# Altium PCB NodeMCU_Weather.PcbDoc
Units mm, origin at the board's own origin, x right, y up, seen from the top; angles counter-clockwise.
Board outline 45 x 76 mm, 2 copper layers (Top Layer, Bottom Layer), stack 1.571 mm thick; 5 components, 4 nets, 44 pads, 84 vias.
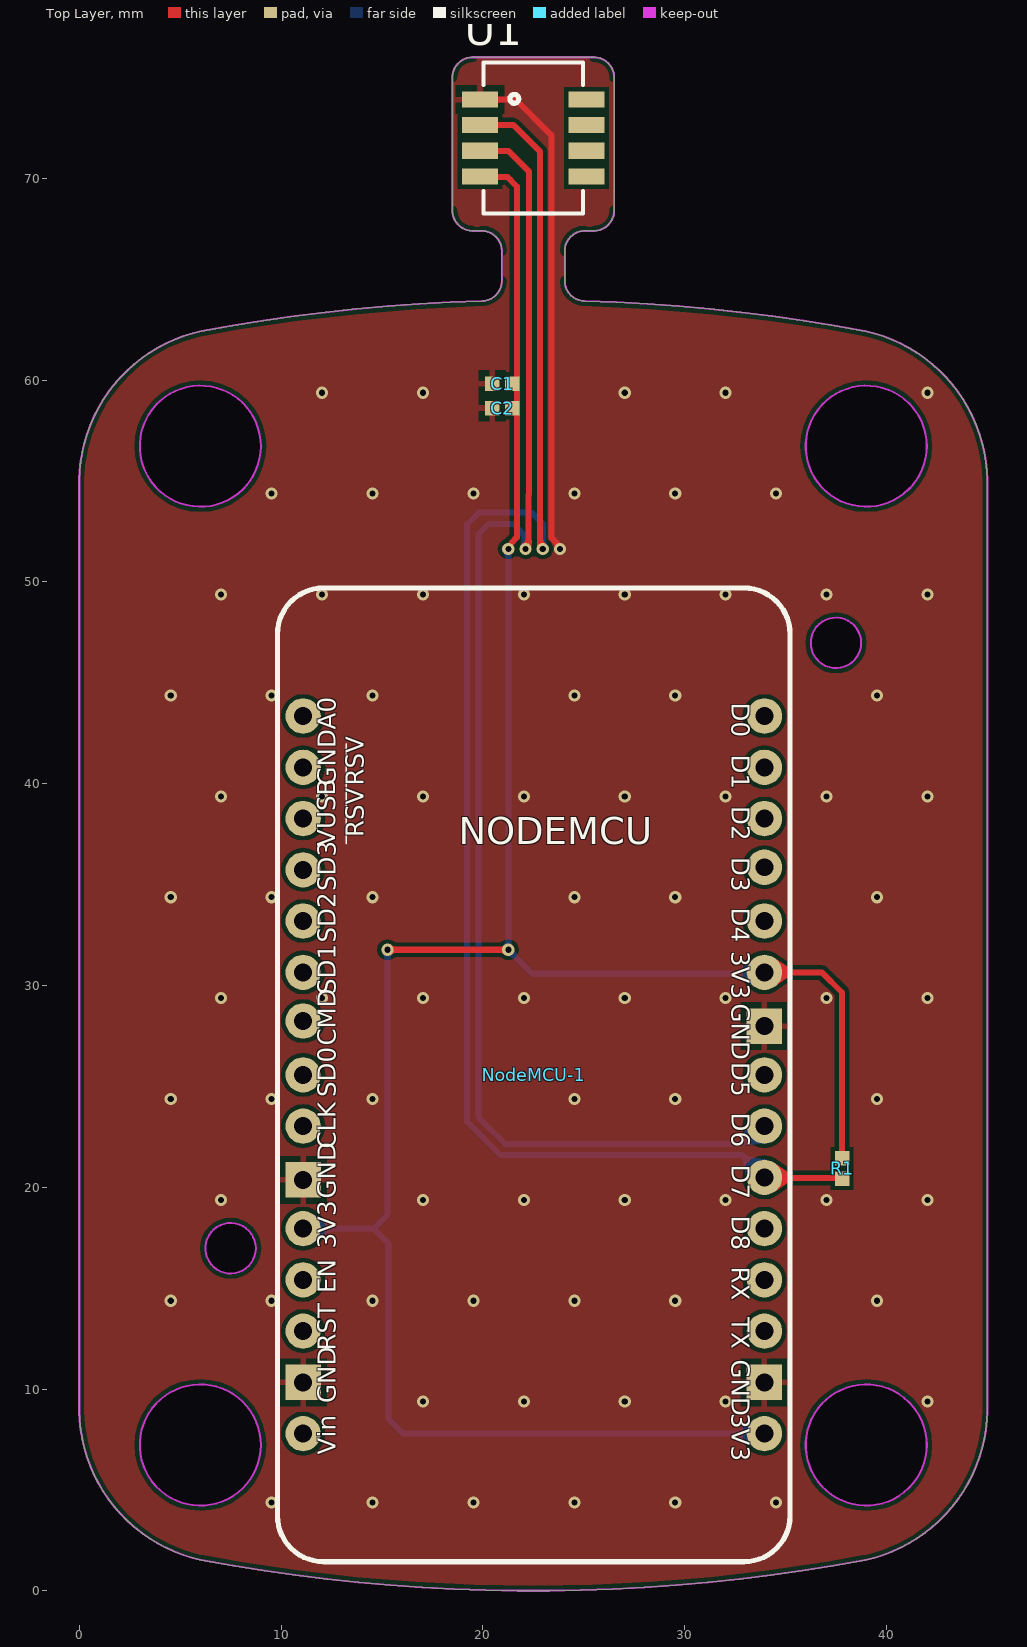
[diagram p0: Top Layer view]
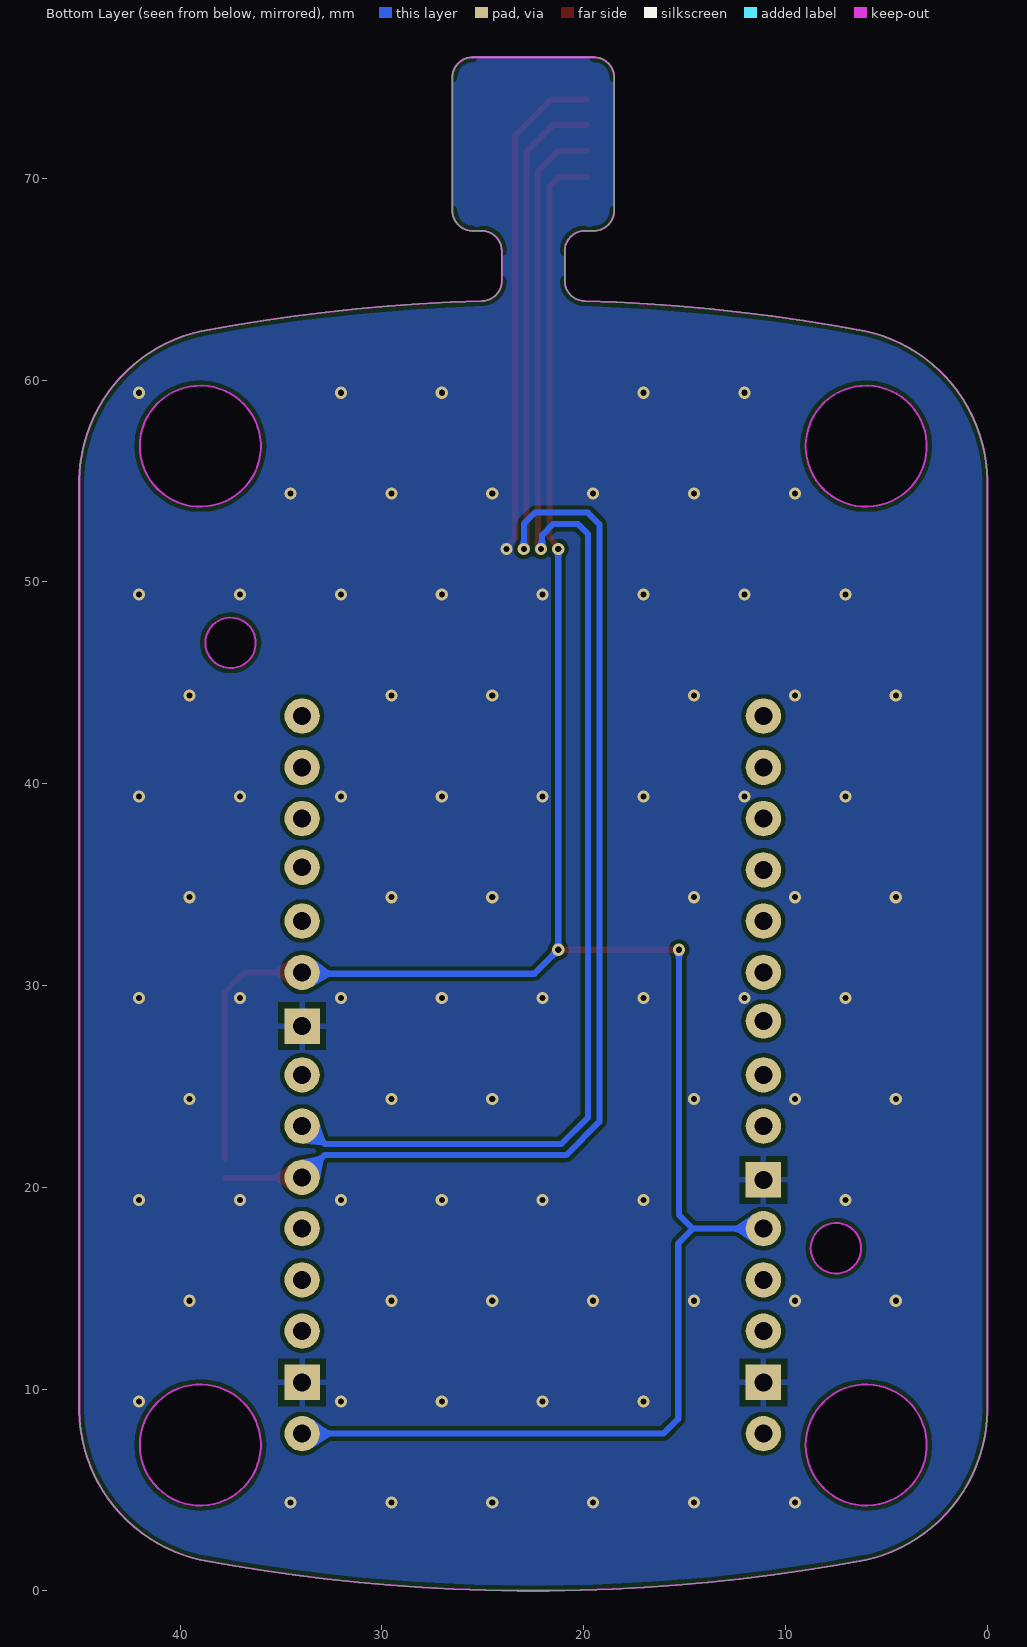
[diagram p1: Bottom Layer view, seen from below]
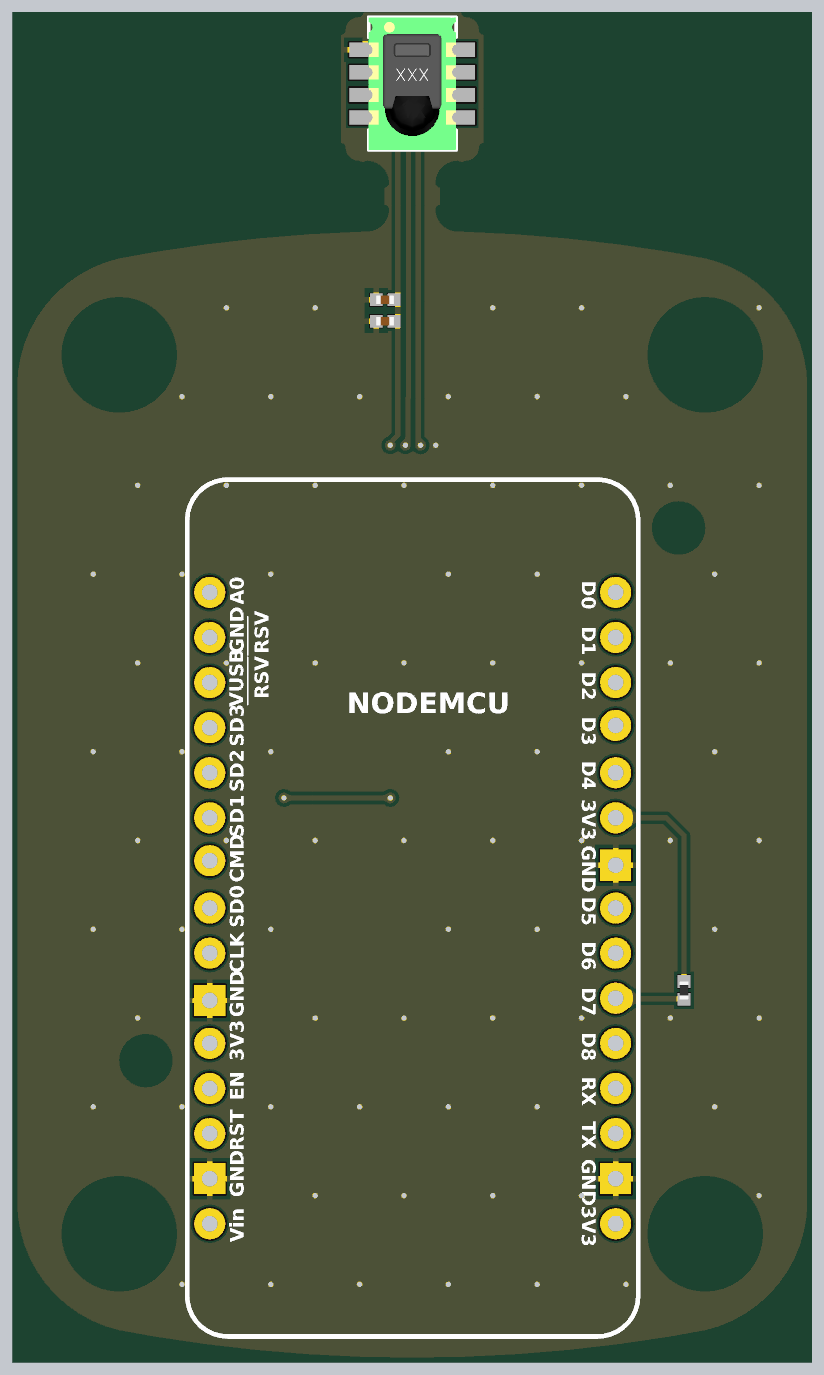
[diagram p2: 3D render of the assembled board from above, using the file's embedded part models]

## Layer stack, top to bottom
Top Solder: solder mask 0.0102, Solder Resist, Dk 3.5
Top Layer: signal copper 0.0356
Dielectric 1: dielectric 1.5, FR-4, Dk 4.8
Bottom Layer: signal copper 0.0356
Bottom Solder: solder mask 0.0102, Solder Resist, Dk 3.5

## Board outline
6.057,1.522 cw(c7.683,9.031) 0,8.919 0,55.033 cw(c7.683,54.921) 6.057,62.431 cw(c22.563,-25.98) 19.939,63.92 ccw(c19.939,64.92) 20.939,64.92 20.939,66.4 ccw(c19.939,66.4) 19.939,67.4 19.49,67.4 cw(c19.49,68.4) 18.49,68.4 18.49,75 cw(c19.49,75) 19.49,76 25.51,76 cw(c25.51,75) 26.51,75 26.51,68.4 cw(c25.51,68.4) 25.51,67.4 25.061,67.4 ccw(c25.061,66.4) 24.061,66.4 24.061,64.92 ccw(c25.061,64.92) 25.061,63.92 cw(c22.437,-25.98) 38.943,62.431 cw(c37.317,54.921) 45,55.033 45,8.919 cw(c37.317,9.031) 38.943,1.522 cw(c22.5,89.609)
cut-out: 36,7.226 ccw(c39,7.226) 39,4.226 ccw(c39,7.226) 42,7.226 ccw(c39,7.226) 39,10.226 ccw(c39,7.226)
cut-out: 6,4.226 cw(c6,7.226) 3,7.226 cw(c6,7.226) 6,10.226 cw(c6,7.226) 9,7.226 cw(c6,7.226)
cut-out: 7.5,15.726 cw(c7.5,16.976) 6.25,16.976 cw(c7.5,16.976) 7.5,18.226 cw(c7.5,16.976) 8.75,16.976 cw(c7.5,16.976)
cut-out: 6,53.726 cw(c6,56.726) 3,56.726 cw(c6,56.726) 6,59.726 cw(c6,56.726) 9,56.726 cw(c6,56.726)
cut-out: 39,53.726 cw(c39,56.726) 36,56.726 cw(c39,56.726) 39,59.726 cw(c39,56.726) 42,56.726 cw(c39,56.726)
cut-out: 37.5,45.726 cw(c37.5,46.976) 36.25,46.976 cw(c37.5,46.976) 37.5,48.226 cw(c37.5,46.976) 38.75,46.976 cw(c37.5,46.976)

## Design rules (kind name [scope] priority, off if disabled: settings)
Clearance [All] p1: gap=0.2 ignorepadtopadclearanceinfootprint=FALSE
PolygonConnect [All] p1: thpad.connectstyle=Relief thpad.reliefconductorwidth=0.3 thpad.reliefentries=4 thpad.polygonreliefangle="90 Angle" thpad.airgapwidth=0.3 smdpad.connectstyle=Relief smdpad.reliefconductorwidth=0.3 smdpad.reliefentries=4 smdpad.polygonreliefangle="90 Angle" smdpad.airgapwidth=0.3 via.connectstyle=Direct via.reliefconductorwidth=0.254 via.reliefentries=4 via.polygonreliefangle="90 Angle" via.airgapwidth=0.254
RoutingVias [All] p1: holewidth=0.3 width=0.6 viastyle="Through Hole" minholewidth=0.3 minwidth=0.6 maxholewidth=0.3 maxwidth=0.6
SolderMaskExpansion [All] p1: expansion=0.102
Width [All] p1 off: maxlimit=0.254 minlimit=0.254 preferedwidth=0.254
30 further rules are at their usual default settings.

## Components (designator, comment, footprint, x,y, rotation, side; value= is the part's Value field where it differs from the comment)
C1 "1uF" C0402(1005) 20.968,59.824 r0 top
C2 "100nF" C0402(1005) 20.968,58.617 r0 top
NodeMCU-1 "NodeMCU V1.0 ESP-12E" "NodeMCU (+ LoLin)" 9.8,49.598 r0 top
R1 "10K" R0402(1005) 37.801,20.932 r90 top
U1 "SHT11" SHT11 22.5,72 r0 top

## Footprints (in the part's own frame and the unit in brackets; to place one, negate y for a bottom-side part, rotate by r counter-clockwise, add the part's x,y. Pads: shape width x height; smd on the part's side, far side on the other; paste and mask are expansions set on the pad)
C0402(1005) [mm] "Chip Capacitor, Body 1.0x0.5mm, Height 0.6mm, IPC Low Density"
  rect 0.72x0.72 smd mask+0.05: 1(-0.5,0) 2(0.5,0)
  body extent -0.5,-0.25 0.5,0.25, height 0.5
"NodeMCU (+ LoLin)" [mil]
  round 69 hole 35: 3V3(51,-1246) 3V3(951,-1646) 3V3(951,-746) A0(51,-246) CLK(51,-1046) CMD(51,-841) D0(951,-246) D1(951,-346) D2(951,-446) D3(951,-541) D4(951,-646) D5(951,-946) D6(951,-1046) D7(951,-1146) D8(951,-1246) EN(51,-1346) RST(51,-1446) RSV(51,-446) RSV(51,-346) RX(951,-1346) SD0(51,-946) SD1(51,-746) SD2(51,-646) SD3(51,-546) TX(951,-1446) VIN(51,-1646)
  rect 69x69 hole 35: GND(51,-1546) GND(51,-1151) GND(951,-1546) GND(951,-851)
  silkscreen extent 1,-1896 1001,4
R0402(1005) [mm] "Chip Capacitor, Body 1.0x0.5mm, Height 0.6mm, IPC Low Density"
  rect 0.72x0.72 smd mask+0.05: 1(-0.5,0) 2(0.5,0)
  body extent -0.5,-0.25 0.5,0.25, height 0.3
SHT11 [mm]
  rect 1.8x0.8 smd: 1(-2.64,1.905) 2(-2.64,0.635) 3(-2.64,-0.635) 4(-2.64,-1.905) 5(2.64,-1.905) 6(2.64,-0.635) 7(2.64,0.635) 8(2.64,1.905)
  silkscreen extent -2.46,-3.73 2.47,3.73, body extent -2.46,-3.73 2.47,3.73, height 2.35

## Part data
C1 C2: library part Cap, "Capacitor"
NodeMCU-1: "NodeMCU V1.0 ESP8266 (ESP-12E)"
R1: library part R, "Resistor"
U1: "Humidity Temperature Sensor 0 ~ 100% RH Digital ±3% RH 8s Surface Mount"

## Via types
v1: diameter 0.6, hole 0.3, Top Layer to Bottom Layer, tented both sides, 84 vias

## Nets (pads, with @x,y where several pads share a name; then routed paths per layer and width w, separated by ;. In a path a pad name is that pad's centre, name@x,y a point inside that pad or via, vN(x,y) a via of type N, cw(c..) or ccw(c..) an arc to the next point about the centre after c; other vN are vias at no path point)
3V3: C1.2 C2.2 NodeMCU-1.3V3 R1.2 U1.4 | length 117.5
  Top Layer w0.3: v1(15.275,31.769) v1(21.262,31.769) ; U1.4 19.879,70.076 21.21,70.076 21.691,69.595 21.691,52.204 21.412,51.925 ; NodeMCU-1.3V3@33.955,30.65 36.802,30.65 37.801,29.651 R1.2
  Bottom Layer w0.3: NodeMCU-1.3V3@11.095,17.95 14.589,17.95 ; v1@15.295,31.633 15.285,31.623 15.285,18.646 14.589,17.95 ; v1(21.262,51.633) v1(21.262,31.769) 22.45,30.581 33.886,30.581 NodeMCU-1.3V3@33.955,30.65 ; NodeMCU-1.3V3@33.955,7.79 16.05,7.79 15.316,8.524 15.316,17.223 14.589,17.95
DATA: NodeMCU-1.D7 R1.1 U1.2 | length 78.1
  Top Layer w0.3: U1.2 21.528,72.635 22.84,71.323 22.84,51.763 v1(22.969,51.633) ; NodeMCU-1.D7 33.984,20.461 37.772,20.461 R1.1
  Bottom Layer w0.3: v1(22.969,51.633) 22.969,52.878 22.418,53.429 19.79,53.429 19.226,52.865 19.226,23.24 20.875,21.591 32.854,21.591 NodeMCU-1.D7
GND: C1.1 C2.1 NodeMCU-1.GND U1.1 | length 25
  Top Layer w0.3: U1.1 21.63,73.905 23.394,72.141 23.394,52.204 23.673,51.925 23.673,51.864 23.823,51.714 v1(23.823,51.633)
  other v1: 9.534,4.374 14.534,4.374 19.534,4.374 24.534,4.374 29.534,4.374 34.534,4.374 17.034,9.374 22.034,9.374 27.034,9.374 32.034,9.374 42.034,9.374 4.534,14.374 9.534,14.374 14.534,14.374 19.534,14.374 24.534,14.374 29.534,14.374 39.534,14.374 7.034,19.374 17.034,19.374 22.034,19.374 27.034,19.374 32.034,19.374 37.034,19.374 42.034,19.374 4.534,24.374 9.534,24.374 14.534,24.374 24.534,24.374 29.534,24.374 39.534,24.374 7.034,29.374 12.034,29.374 17.034,29.374 22.034,29.374 27.034,29.374 32.034,29.374 37.034,29.374 42.034,29.374 4.534,34.374 9.534,34.374 14.534,34.374 24.534,34.374 29.534,34.374 39.534,34.374 7.034,39.374 12.034,39.374 17.034,39.374 22.034,39.374 27.034,39.374 32.034,39.374 37.034,39.374 42.034,39.374 4.534,44.374 9.534,44.374 14.534,44.374 24.534,44.374 29.534,44.374 39.534,44.374 7.034,49.374 12.034,49.374 17.034,49.374 22.034,49.374 27.034,49.374 32.034,49.374 37.034,49.374 42.034,49.374 9.534,54.374 14.534,54.374 19.534,54.374 24.534,54.374 29.534,54.374 34.534,54.374 12.034,59.374 17.034,59.374 27.034,59.374 32.034,59.374 42.034,59.374
SCK: NodeMCU-1.D6 U1.3 | length 69
  Top Layer w0.3: U1.3 21.27,71.365 22.286,70.349 22.286,54.341 22.266,54.32 22.266,51.783 v1(22.116,51.633)
  Bottom Layer w0.3: v1(22.116,51.633) 22.058,51.69 22.058,52.318 21.501,52.875 20.294,52.875 19.78,52.361 19.78,23.469 21.104,22.145 32.813,22.145 33.698,23.03 NodeMCU-1.D6
pads on no net: NodeMCU-1.A0 NodeMCU-1.CLK NodeMCU-1.CMD NodeMCU-1.D0 NodeMCU-1.D1 NodeMCU-1.D2 NodeMCU-1.D3 NodeMCU-1.D4 NodeMCU-1.D5 NodeMCU-1.D8 NodeMCU-1.EN NodeMCU-1.RST NodeMCU-1.RSV NodeMCU-1.RX NodeMCU-1.SD0 NodeMCU-1.SD1 NodeMCU-1.SD2 NodeMCU-1.SD3 NodeMCU-1.TX NodeMCU-1.VIN U1.5 U1.6 U1.7 U1.8

## Polygon pours and split planes (outlines as drawn)
GND on Top Layer (solid, pour order 0): 6.057,1.522 cw(c7.683,9.031) 0,8.919 0,55.033 cw(c7.683,54.921) 6.057,62.431 cw(c22.563,-25.98) 19.939,63.92 ccw(c19.939,64.92) 20.939,64.92 20.939,66.4 ccw(c19.939,66.4) 19.939,67.4 19.49,67.4 cw(c19.49,68.4) 18.49,68.4 18.49,75 cw(c19.49,75) 19.49,76 25.51,76 cw(c25.51,75) 26.51,75 26.51,68.4 cw(c25.51,68.4) 25.51,67.4 25.061,67.4 ccw(c25.061,66.4) 24.061,66.4 24.061,64.92 ccw(c25.061,64.92) 25.061,63.92 cw(c22.437,-25.98) 38.943,62.431 cw(c37.317,54.921) 45,55.033 45,8.919 cw(c37.317,9.031) 38.943,1.522 cw(c22.5,89.609)
GND on Bottom Layer (solid, pour order 1): 6.057,1.522 cw(c7.683,9.031) 0,8.919 0,55.033 cw(c7.683,54.921) 6.057,62.431 cw(c22.563,-25.98) 19.939,63.92 ccw(c19.939,64.92) 20.939,64.92 20.939,66.4 ccw(c19.939,66.4) 19.939,67.4 19.49,67.4 cw(c19.49,68.4) 18.49,68.4 18.49,75 cw(c19.49,75) 19.49,76 25.51,76 cw(c25.51,75) 26.51,75 26.51,68.4 cw(c25.51,68.4) 25.51,67.4 25.061,67.4 ccw(c25.061,66.4) 24.061,66.4 24.061,64.92 ccw(c25.061,64.92) 25.061,63.92 cw(c22.437,-25.98) 38.943,62.431 cw(c37.317,54.921) 45,55.033 45,8.919 cw(c37.317,9.031) 38.943,1.522 cw(c22.5,89.609)

## Keep-outs
Keep-Out Layer:
  circle w0.1: c6,7.226 r3
  circle w0.1: c39,7.226 r3
  circle w0.1: c6,56.726 r3
  circle w0.1: c39,56.726 r3
  circle w0.1: c37.5,46.976 r1.25
  circle w0.1: c7.5,16.976 r1.25
  lines w0.1: 19.49,76 ccw(c19.49,75) 18.49,75 18.49,68.4 ccw(c19.49,68.4) 19.49,67.4 19.939,67.4 cw(c19.939,66.4) 20.939,66.4 20.939,64.92 cw(c19.939,64.92) 19.939,63.92 ccw(c22.563,-25.98) 6.057,62.431 ccw(c7.683,54.921) 0,55.033 0,8.919 ccw(c7.683,9.031) 6.057,1.522 ccw(c22.5,89.609) 38.943,1.522 ccw(c37.317,9.031) 45,8.919 45,55.033 ccw(c37.317,54.921) 38.943,62.431 ccw(c22.437,-25.98) 25.061,63.92 cw(c25.061,64.92) 24.061,64.92 24.061,66.4 cw(c25.061,66.4) 25.061,67.4 25.51,67.4 ccw(c25.51,68.4) 26.51,68.4 26.51,75 ccw(c25.51,75) 25.51,76 ; 19.49,76 25.51,76

## Silkscreen, mask and mechanical layers (free items; w line width, h text height)
Mechanical 1:
  circle w0.013: c39.008,7.208 r1.25
  circle w0.013: c39.008,7.208 r2.75
  circle w0.013: c6.008,56.708 r1.25
  circle w0.013: c6.008,56.708 r2.75
  circle w0.013: c6.008,7.208 r1.25
  circle w0.013: c6.008,7.208 r2.75
  circle w0.013: c39.008,56.708 r1.25
  circle w0.013: c39.008,56.708 r2.75
  circle w0.013: c7.508,46.958 r1
  circle w0.013: c7.508,46.958 r2.25
  circle w0.013: c37.508,16.958 r2.25
  circle w0.013: c37.508,16.958 r1
  circle w0.013: c37.508,46.958 r1
  circle w0.013: c37.508,46.958 r2.25
  circle w0.013: c7.508,16.958 r2.25
  circle w0.013: c7.508,16.958 r1
  lines w0.013: -0.176,9.245 3.035,9.245 ; -0.176,54.701 0.145,54.7 0.466,54.698 0.788,54.697 1.109,54.695 1.43,54.693 1.751,54.69 2.072,54.688 3.035,54.679 ; -0.176,54.714 -0.537,55.015 ; 2.988,9.236 ccw(c7.813,9.216) 3.281,7.561 ; 2.988,9.241 2.988,54.67 ; 2.988,9.246 3.07,9.246 ; 2.988,54.671 cw(c7.822,54.698) 3.281,56.355 ; 2.988,54.673 3.07,54.673 ; 3.308,7.731 cw(c7.836,9.218) 3.07,9.246 ; 3.308,56.185 ccw(c7.697,54.732) 3.221,55.889 ccw(c7.89,54.693) 3.07,54.673 ; 6.37,1.344 5.98,1.049 ; 6.418,1.335 6.996,4.494 ; 6.418,62.581 6.996,59.422 ; 6.622,4.527 ccw(c7.897,9.472) 6.979,4.449 ; 6.622,59.388 cw(c7.894,54.453) 6.978,59.467 ; 6.79,4.571 ccw(c7.916,9.564) 7,4.529 ; 6.79,59.344 cw(c7.91,54.373) 7.003,59.388 ; 38.028,4.447 38.013,4.528 ; 38.028,4.447 cw(c22.508,89.209) 6.985,4.448 7,4.529 ; 38.029,4.447 ccw(c37.121,9.47) 38.394,4.527 ; 38.029,4.495 38.151,3.865 38.211,3.549 38.271,3.234 38.331,2.919 38.391,2.603 38.451,2.288 38.511,1.972 38.629,1.341 ; 38.028,59.42 38.211,60.366 38.271,60.682 38.331,60.997 38.391,61.313 38.451,61.628 38.51,61.944 38.57,62.259 38.629,62.575 ; 38.029,59.468 cw(c37.118,54.437) 38.394,59.388 ; 38.226,4.571 cw(c37.106,9.542) 38.013,4.528 ; 38.226,59.344 ccw(c37.1,54.352) 38.016,59.387 ; 38.646,1.344 39.036,1.049 ; 38.646,62.572 39.036,62.867 ; 41.708,7.731 ccw(c37.337,9.177) 41.794,8.024 ccw(c37.113,9.224) 41.946,9.243 ; 41.708,56.185 cw(c37.18,54.698) 41.946,54.67 ; 41.735,7.561 ccw(c37.195,9.217) 42.028,9.236 ; 41.735,56.354 cw(c37.202,54.699) 42.028,54.671 ; 41.981,9.245 45.192,9.245 ; 41.98,54.679 42.623,54.686 42.944,54.688 43.265,54.691 43.586,54.693 43.907,54.695 44.228,54.697 44.55,54.699 45.192,54.702 ; 42.028,9.243 41.946,9.243 ; 42.028,9.245 42.028,54.67 41.946,54.67 ; 45.192,54.714 45.553,55.015 ; -1.592,8.853 ccw(c7.39,8.85) 5.733,0.022 ; -1.592,8.853 -1.54,8.853 ; -1.592,8.853 -1.592,55.063 ; -1.592,55.063 cw(c7.39,55.066) 5.733,63.894 ; -1.592,55.063 -1.54,55.063 ; -1.54,8.853 ccw(c7.39,8.85) 5.743,0.073 ; -1.54,8.853 -1.54,55.063 ; -1.54,55.063 cw(c7.39,55.066) 5.743,63.843 ; -0.537,8.901 ccw(c7.449,8.898) 5.98,1.049 ; -0.537,8.901 -0.176,9.201 ; -0.537,8.901 -0.537,55.015 ; -0.537,55.015 cw(c7.449,55.017) 5.98,62.867 ; -0.176,9.201 ccw(c7.821,9.208) 6.387,1.341 ccw(c22.508,89.209) 38.622,1.339 ccw(c37.195,9.208) 45.192,9.201 ; -0.176,9.201 -0.176,54.692 cw(c7.821,54.708) 6.37,62.572 ; 3.07,9.246 3.07,54.673 ; 5.733,0.022 ccw(c22.508,89.209) 39.283,0.022 ; 5.733,0.022 5.743,0.073 ; 5.733,63.894 cw(c22.508,-25.294) 39.283,63.894 ; 5.733,63.894 5.743,63.843 ; 5.743,0.073 ccw(c22.508,89.209) 39.273,0.073 ; 5.743,63.843 cw(c22.508,-25.294) 39.273,63.843 ; 5.98,1.049 ccw(c22.508,89.209) 39.036,1.049 ; 5.98,62.867 cw(c22.508,-25.294) 39.036,62.867 ; 5.98,62.867 6.37,62.572 ; 6.37,62.572 cw(c22.508,-25.294) 38.622,62.576 cw(c37.195,54.708) 45.192,54.692 45.192,9.201 ; 7,4.529 ccw(c22.508,89.209) 38.013,4.528 ; 7.003,59.388 cw(c22.508,-25.294) 38.016,59.387 ; 7.003,59.388 6.988,59.469 cw(c22.508,-25.294) 38.031,59.468 38.016,59.387 ; 39.036,1.049 ccw(c37.567,8.898) 45.553,8.901 ; 39.036,62.867 cw(c37.567,55.017) 45.553,55.015 ; 39.273,0.073 ccw(c37.626,8.85) 46.556,8.853 ; 39.273,0.073 39.283,0.022 ; 39.273,63.843 cw(c37.626,55.066) 46.556,55.063 ; 39.273,63.843 39.283,63.894 ; 39.283,0.022 ccw(c37.626,8.85) 46.608,8.853 ; 39.283,63.894 cw(c37.626,55.066) 46.608,55.063 ; 41.946,9.243 41.946,54.67 ; 45.192,9.201 45.553,8.901 ; 45.553,8.901 45.553,55.015 ; 46.556,8.853 46.608,8.853 ; 46.556,8.853 46.556,55.063 ; 46.556,55.063 46.608,55.063 ; 46.608,8.853 46.608,55.063 ; -2.592,8.853 ccw(c7.39,8.85) 5.548,-0.961 ccw(c22.508,89.209) 39.468,-0.961 ccw(c37.626,8.85) 47.608,8.853 47.608,55.063 ccw(c37.626,55.066) 39.468,64.877 ccw(c22.508,-25.294) 5.548,64.877 ccw(c7.39,55.066) -2.592,55.063 -2.592,8.853
Drill Drawing:
  lines w0.1: 26.5,67.4 27.5,67.4 27.5,68.4 ; 0,0 0,76 45,76 45,0 0,0

## Dimensions
0,76 to 0,0 on Drill Drawing
0,0 to 45,0 on Drill Drawing

## Text inside footprints (layer, text, board x,y; h text height)
NodeMCU-1: Top Overlay "NODEMCU" at 18.817,36.543 h2.29; Top Overlay "CLK" at 13,21.912 h1.52 r90; Top Overlay "SD0" at 13,24.463 h1.52 r90; Top Overlay "SD1" at 13,29.565 h1.52 r90; Top Overlay "SD2" at 13,32.116 h1.52 r90; Top Overlay "SD3" at 13,34.667 h1.52 r90; Top Overlay "A0" at 13,42.664 h1.52 r90; Top Overlay "D5" at 32.05,26.205 h1.52 r270; Top Overlay "GND" at 32.05,29.101 h1.52 r270; Top Overlay "3V3" at 32.05,31.691 h1.52 r270; Top Overlay "D4" at 32.05,33.85 h1.52 r270; Top Overlay "D3" at 32.05,36.35 h1.52 r270; Top Overlay "D2" at 32.05,38.89 h1.52 r270; Top Overlay "D1" at 32.05,41.436 h1.52 r270; Top Overlay "D0" at 32.05,44.01 h1.52 r270; Top Overlay "CMD" at 13,27.014 h1.52 r90; Top Overlay "D6" at 32.05,23.687 h1.52 r270; Top Overlay "3V3" at 32.05,8.806 h1.52 r270; Top Overlay "GND" at 32.05,11.442 h1.52 r270; Top Overlay "TX" at 32.05,13.556 h1.52 r270; Top Overlay "RX" at 32.05,16.069 h1.52 r270; Top Overlay "D8" at 32.05,18.582 h1.52 r270; Top Overlay "D7" at 32.05,21.119 h1.52 r270; Top Overlay "Vin" at 13,6.749 h1.52 r90; Top Overlay "GND" at 13,9.289 h1.52 r90; Top Overlay "RST" at 13,11.905 h1.52 r90; Top Overlay "EN" at 13,14.75 h1.52 r90; Top Overlay "3V3" at 13,16.959 h1.52 r90; Top Overlay "GND" at 13,19.423 h1.52 r90; Top Overlay "VUSB" at 12.975,36.898 h1.52 r90; Top Overlay "GND" at 13,39.896 h1.52 r90; Top Overlay "RSV" at 14.397,39.896 h1.52 r90; Top Overlay "RSV" at 14.397,37.345 h1.52 r90